# EAGLE board CT_schematic (EAGLE 7.6.0)

Size 100 x 80 mm. Coordinates in mm from the lower left corner, seen from the top.
Outline: 0,0 100,0 100,80 0,80 0,0
Copper layers (1*16): Top 0.035mm / dielectric 1.5mm / Bottom 0.035mm
Design rules "default": minimum track width 10mil, minimum drill 24mil, track to track 8mil, track to pad 8mil, pad to pad 8mil, via to via 8mil, smd to smd 8mil, copper to edge 40mil, drill to drill 8mil, minimum pad ring 10mil, minimum via ring 8mil, stop-mask expansion 4mil, vias tented up to drill 0mil, thermal gap 10mil

## Footprints (pad centres in the part's own frame; a part is rotated, then mirrored left to right if it is on the bottom)
C0603 = smd 0.8 x 0.8: 1 -0.762,0; 2 0.762,0
C0402 = smd 0.5 x 0.5: 1 -0.508,0; 2 0.508,0
C0805 = smd 1.2 x 1.3: 1 -1.016,0; 2 1.016,0
R0603 = smd 0.8 x 0.8: 1 -0.762,0; 2 0.762,0
C1206 = smd 1.3 x 1.6: 1 -1.524,0; 2 1.524,0
C1210 = smd 1.2 x 2.5: 1 -1.524,0; 2 1.524,0
2220 = smd 1.85 x 5.5: 1 -2.55,0; 2 2.55,0
EXV-9H = smd 3.505 x 1.676: 1 -2.857,0; 2 2.857,0
L0603 = smd 0.8 x 0.8: 1 -0.762,0; 2 0.762,0
DR1040 = smd 1.6 x 3.2: 1 -4.458,0; 2 4.458,0
PJ-037B_PACKAGE = drill 3.7 square: 1 12,0 | drill 3.2 square: 2 6,0
WLCSP66 = smd 0.229 x 0.229: A1 -1.6,1.6; A2 -1.2,1.6; A3 -0.8,1.6; A4 -0.4,1.6; A5 0,1.6; A6 0.4,1.6; A7 0.8,1.6; A8 1.2,1.6; A9 1.6,1.6; B1 -1.6,1.2; B2 -1.2,1.2; B3 -0.8,1.2; B4 -0.4,1.2; B5 0,1.2; B6 0.4,1.2; B7 0.8,1.2; B8 1.2,1.2; B9 1.6,1.2; C1 -1.6,0.8; C2 -1.2,0.8; C3 -0.8,0.8; C7 0.8,0.8; C8 1.2,0.8; C9 1.6,0.8; D1 -1.6,0.4; D2 -1.2,0.4; D3 -0.8,0.4; D7 0.8,0.4; D8 1.2,0.4; D9 1.6,0.4; E1 -1.6,0; E2 -1.2,0; E3 -0.8,0; E7 0.8,0; E8 1.2,0; E9 1.6,0; F1 -1.6,-0.4; F2 -1.2,-0.4; F3 -0.8,-0.4; F7 0.8,-0.4; F8 1.2,-0.4; F9 1.6,-0.4; G1 -1.6,-0.8; G2 -1.2,-0.8; G3 -0.8,-0.8; G7 0.8,-0.8; G8 1.2,-0.8; G9 1.6,-0.8; H1 -1.6,-1.2; H2 -1.2,-1.2; H3 -0.8,-1.2; H4 -0.4,-1.2; H5 0,-1.2; H6 0.4,-1.2; H7 0.8,-1.2; H8 1.2,-1.2; H9 1.6,-1.2; J1 -1.6,-1.6; J2 -1.2,-1.6; J3 -0.8,-1.6; J4 -0.4,-1.6; J5 0,-1.6; J6 0.4,-1.6; J7 0.8,-1.6; J8 1.2,-1.6; J9 1.6,-1.6
SOIC-8 = smd 1.6 x 0.6: 1 -2.7,1.905 | smd 1.55 x 0.6: 2 -2.7,0.635; 3 -2.7,-0.635; 4 -2.7,-1.905; 5 2.7,-1.905; 6 2.7,-0.635; 7 2.7,0.635; 8 2.7,1.905
M41T65_QFN-16 = smd 0.775 x 0.305: 1 -1.387,0.75; 2 -1.387,0.25; 3 -1.387,-0.25; 4 -1.387,-0.75; 9 1.387,-0.75; 10 1.387,-0.25; 11 1.387,0.25; 12 1.387,0.75 | smd 0.305 x 0.775: 5 -0.75,-1.387; 6 -0.25,-1.387; 7 0.25,-1.387; 8 0.75,-1.387; 13 0.75,1.387; 14 0.25,1.387; 15 -0.25,1.387; 16 -0.75,1.387 | smd 1.6 x 1.6: 17 0,0
SON-8 = smd 0.35 x 0.85: 1 -0.975,-1.475; 2 -0.325,-1.475; 3 0.325,-1.475; 4 0.975,-1.475; 5 0.975,1.475; 6 0.325,1.475; 7 -0.325,1.475; 8 -0.975,1.475 | smd 2.4 x 1.65: PAD 0,0
QFN-24 = smd 0.7 x 0.305: 1 -1.815,1.25; 2 -1.815,0.75; 3 -1.815,0.25; 4 -1.815,-0.25; 5 -1.815,-0.73; 6 -1.815,-1.25; 13 1.815,-1.25; 14 1.815,-0.75; 15 1.815,-0.25; 16 1.815,0.25; 17 1.815,0.75; 18 1.815,1.25 | smd 0.305 x 0.7: 7 -1.25,-1.815; 8 -0.75,-1.815; 9 -0.25,-1.815; 10 0.25,-1.815; 11 0.75,-1.815; 12 1.25,-1.815; 19 1.25,1.815; 20 0.75,1.815; 21 0.25,1.815; 22 -0.25,1.815; 23 -0.75,1.815; 24 -1.25,1.815 | smd 2.591 x 2.591: 25 0,0
USB-A-H = drill 0.914: 1 2.718,3.493; 2 2.718,1.003; 3 2.718,-1.003; 4 2.718,-3.493 | drill 2.311: 5 0,-6.566; 6 0,6.566
SOT143B = smd 1 x 0.7: 1 -0.75,-1 | smd 0.6 x 0.7: 2 0.95,-1; 3 0.95,1; 4 -0.95,1
SOT-23-6 = smd 1.1 x 0.6: 1 -1.4,0.95; 2 -1.4,0; 3 -1.4,-0.95; 4 1.4,-0.95; 5 1.4,0; 6 1.4,0.95
ABS07-32.768KHZ-7-T = smd 1.1 x 2.4: 1 -2.5,0; 2 0,0
ASEK = smd 1.4 x 1: 1 -1.1,-0.8; 2 1.1,-0.8; 3 1.1,0.8; 4 -1.1,0.8
ASFL1 = smd 1.7 x 1.5: 1 -1.27,-1.1; 2 1.27,-1.1; 3 1.27,1.1; 4 -1.27,1.1
WSON-8 = smd 0.3 x 0.6: 1 -0.75,0; 2 0.05,0; 3 0.85,0; 4 1.65,0; 5 1.65,3.8; 6 0.85,3.8; 7 0.05,3.8; 8 -0.75,3.8 | smd 3 x 2.6: PAD 0.45,1.9
QFN-16_EP = smd 0.805 x 0.3: 1 -1.452,0.75; 2 -1.452,0.25; 3 -1.452,-0.25; 4 -1.452,-0.75; 9 1.452,-0.75; 10 1.452,-0.25; 11 1.452,0.25; 12 1.452,0.75 | smd 0.3 x 0.805: 5 -0.75,-1.452; 6 -0.25,-1.452; 7 0.25,-1.452; 8 0.75,-1.452; 13 0.75,1.452; 14 0.25,1.452; 15 -0.25,1.452; 16 -0.75,1.452 | smd 1.55 x 1.55: 17 0,0
SON-6 = smd 0.55 x 0.3: 1 -0.355,0.5 | smd 0.52 x 0.3: 2 -0.37,0; 3 -0.37,-0.5; 4 0.37,-0.5; 5 0.37,0; 6 0.37,0.5
SW_4-1437565-2 = smd 1.4 x 2.1: 1 -2.23,4.55; 2 -2.23,-4.55; 3 2.23,4.55; 4 2.23,-4.55
LGM67K-G1J2-24-Z = smd 0.8 x 1.4: A -2,0; C 0,0
NC7SZ125M5X = smd 1.3 x 0.7: 1 -1.3,0.95; 2 -1.3,0; 3 -1.3,-0.95; 4 1.3,-0.95; 5 1.3,0.95

## Placement (x,y rotation side)
C1  1e-06  [C0603]  -34.29,64.77 0 top  (outside the outline)
C2  1e-07  [C0603]  -38.1,64.77 0 top  (outside the outline)
C3  1e-07  [C0603]  -41.91,64.77 0 top  (outside the outline)
C4  1e-07  [C0603]  -45.72,64.77 0 top  (outside the outline)
C5  1e-07  [C0603]  -49.53,64.77 0 top  (outside the outline)
C6  1e-07  [C0603]  -53.34,64.77 0 top  (outside the outline)
C7  4.7e-06  [C0603]  -19.05,64.77 0 top  (outside the outline)
C8  1e-08  [C0603]  -57.15,64.77 0 top  (outside the outline)
C9  1e-06  [C0603]  -60.96,64.77 0 top  (outside the outline)
C10  2.2e-06  [C0603]  -22.86,64.77 0 top  (outside the outline)
C11  2.2e-06  [C0603]  -26.67,64.77 0 top  (outside the outline)
C12  1e-08  [C0402]  -64.77,69.85 0 top  (outside the outline)
C13  4.7e-06  [C0805]  -15.24,54.61 0 top  (outside the outline)
C14  1e-07  [C0402]  -68.58,69.85 0 top  (outside the outline)
C15  1e-08  [C0402]  -72.39,69.85 0 top  (outside the outline)
C16  2.2e-06  [C0603]  -30.48,64.77 0 top  (outside the outline)
C17  1e-08  [C0402]  -15.24,74.93 0 top  (outside the outline)
C18  1e-08  [C0402]  -19.05,74.93 0 top  (outside the outline)
C19  0.0001  [R0603]  -64.77,64.77 0 top  (outside the outline)
C20  1e-08  [C0402]  -22.86,74.93 0 top  (outside the outline)
C21  1e-08  [C0402]  -26.67,74.93 0 top  (outside the outline)
C22  1e-08  [C0402]  -30.48,74.93 0 top  (outside the outline)
C23  1e-08  [C0402]  -34.29,74.93 0 top  (outside the outline)
C24  1e-05  [C1206]  -54.61,46.99 0 top  (outside the outline)
C25  1e-05  [C0805]  -20.32,54.61 0 top  (outside the outline)
C26  1e-06  [C0603]  -68.58,64.77 0 top  (outside the outline)
C27  1e-05  [C1210]  -48.26,48.26 0 top  (outside the outline)
C28  1e-05  [C0805]  -25.4,54.61 0 top  (outside the outline)
C29  1e-06  [C0603]  -72.39,64.77 0 top  (outside the outline)
C30  1e-07  [C0402]  -38.1,74.93 0 top  (outside the outline)
C31  6.8e-05  [2220]  -33.02,22.86 0 top  (outside the outline)
C32  1e-07  [C0402]  -41.91,74.93 0 top  (outside the outline)
C33  0.0001  [EXV-9H]  -17.78,40.64 0 top  (outside the outline)
C34  0.0001  [EXV-9H]  -29.21,40.64 0 top  (outside the outline)
C35  1e-08  [C0402]  -45.72,74.93 0 top  (outside the outline)
C36  1e-08  [C0402]  -49.53,74.93 0 top  (outside the outline)
F1  240.0  [L0603]  -15.24,69.85 0 top  (outside the outline)
I1  5.2e-06  [DR1040]  -71.12,6.35 0 top  (outside the outline)
J1  PJ-037B  [PJ-037B_PACKAGE]  -44.45,7.62 0 top  (outside the outline)
R2  1000.0  [R0603]  -19.05,69.85 0 top  (outside the outline)
R4  4700.0  [R0603]  -22.86,69.85 0 top  (outside the outline)
R5  4700.0  [R0603]  -26.67,69.85 0 top  (outside the outline)
R6  2200.0  [R0603]  -30.48,69.85 0 top  (outside the outline)
R7  2200.0  [R0603]  -34.29,69.85 0 top  (outside the outline)
R8  2200.0  [R0603]  -38.1,69.85 0 top  (outside the outline)
R9  2200.0  [R0603]  -41.91,69.85 0 top  (outside the outline)
R10  10000.0  [R0603]  -71.12,54.61 0 top  (outside the outline)
R11  10000.0  [R0603]  -15.24,59.69 0 top  (outside the outline)
R12  10000.0  [R0603]  -20.32,59.69 0 top  (outside the outline)
R13  10000.0  [R0603]  -25.4,59.69 0 top  (outside the outline)
R14  10000.0  [R0603]  -30.48,59.69 0 top  (outside the outline)
R15  10000.0  [R0603]  -35.56,59.69 0 top  (outside the outline)
R16  10000.0  [R0603]  -40.64,59.69 0 top  (outside the outline)
R17  10000.0  [R0603]  -45.72,59.69 0 top  (outside the outline)
R18  10000.0  [R0603]  -50.8,59.69 0 top  (outside the outline)
R19  47000.0  [R0603]  -55.88,59.69 0 top  (outside the outline)
R20  8060.0  [R0603]  -45.72,69.85 0 top  (outside the outline)
R21  100000.0  [R0603]  -35.56,54.61 0 top  (outside the outline)
R22  806.0  [R0603]  -49.53,69.85 0 top  (outside the outline)
R23  1000.0  [R0603]  -53.34,69.85 0 top  (outside the outline)
R24  100000.0  [R0603]  -40.64,54.61 0 top  (outside the outline)
R25  153694.38  [R0603]  -30.48,54.61 0 top  (outside the outline)
R26  100000.0  [R0603]  -45.72,54.61 0 top  (outside the outline)
R27  20000.0  [R0603]  -60.96,59.69 0 top  (outside the outline)
R28  150000.0  [R0603]  -50.8,54.61 0 top  (outside the outline)
R29  300000.0  [R0603]  -55.88,54.61 0 top  (outside the outline)
R30  10000.0  [R0603]  -66.04,59.69 0 top  (outside the outline)
R31  10000.0  [R0603]  -71.12,59.69 0 top  (outside the outline)
R32  82000.0  [R0603]  -15.24,64.77 0 top  (outside the outline)
R33  300000.0  [R0603]  -60.96,54.61 0 top  (outside the outline)
R34  120000.0  [R0603]  -66.04,54.61 0 top  (outside the outline)
U1  STM32F205REY6  [WLCSP66]  -16.51,46.99 0 top  (outside the outline)
U2  AT25320B-SSHL-T  [SOIC-8]  -24.13,22.86 0 top  (outside the outline)
U3  M41T65Q6F  [M41T65_QFN-16]  -54.61,74.93 0 top  (outside the outline)
U4  PCF85063TP/1Z  [SON-8]  -35.56,46.99 0 top  (outside the outline)
U5  USB3317C-CP-TR  [QFN-24]  -40.64,48.26 0 top  (outside the outline)
U6  61400416021  [USB-A-H]  -19.05,8.89 0 top  (outside the outline)
U7  prtr5v0u2ax  [SOT143B]  -69.85,74.93 0 top  (outside the outline)
U8  MAX4995AAUT+T  [SOT-23-6]  -59.69,46.99 0 top  (outside the outline)
U9  ABS07-32.768KHZ-7-T  [ABS07-32.768KHZ-7-T]  -50.8,40.64 0 top  (outside the outline)
U10  ABS07-32.768KHZ-7-T  [ABS07-32.768KHZ-7-T]  -69.85,40.64 0 top  (outside the outline)
U11  ASEK-32.768KHz-ECST  [ASEK]  -63.5,31.75 0 top  (outside the outline)
U12  ASFL1-25MHZ-NCS  [ASFL1]  -26.67,31.75 0 top  (outside the outline)
U13  ASFL1-26MHZ-NCS  [ASFL1]  -43.18,31.75 0 top  (outside the outline)
U14  LP3878SDX-ADJ/NOPB  [WSON-8]  -54.61,20.32 0 top  (outside the outline)
U15  LP2951ACSDX/NOPB  [WSON-8]  -72.39,20.32 0 top  (outside the outline)
U16  LTC3601EUD#PBF  [QFN-16_EP]  -58.42,69.85 0 top  (outside the outline)
U17  TPS3895ADRYR  [SON-6]  -73.66,73.66 0 top  (outside the outline)
U18  4-1437565-2  [SW_4-1437565-2]  -60.96,6.35 0 top  (outside the outline)
U19  Q65110A2395  [LGM67K-G1J2-24-Z]  -25.4,48.26 0 top  (outside the outline)
U20  nc7sz125m5x  [NC7SZ125M5X]  -64.77,46.99 0 top  (outside the outline)
U21  nc7sz125m5x  [NC7SZ125M5X]  -71.12,46.99 0 top  (outside the outline)

## Library data of the parts
C1-C36 F1 I1 J1 R2 R4-R34 U1-U21 = circuit_tree

## Nets
CLK_CRYSTAL_U3_1: U3.1 U9.1
CLK_CRYSTAL_U3_2: U3.2 U9.2
CLK_CRYSTAL_U4_1: U4.1 U10.1
CLK_CRYSTAL_U4_2: U4.2 U10.2
CLK_U1_B9: U1.B9 U11.3
CLK_U1_E9: U1.E9 U12.3
CLK_U5_23: U5.23 U13.3
GND: C1.2 C2.2 C3.2 C4.2 C5.2 C6.2 C7.2 C8.2 C9.2 C10.2 C11.2 C12.2 C13.2 C14.2 C15.2 C16.2 C17.2 C18.2 C19.2 C20.2 C21.2 C22.2 C23.2 C24.2 C25.2 C26.2 C27.2 C28.2 C29.2 C31.1 C31.2 C32.2 C33.2 C34.2 C35.2 C36.2 J1.2 R2.2 R10.2 R11.2 R12.2 R19.2 R20.2 R23.2 R26.2 R27.2 R29.2 R32.2 R34.2 U1.B1 U1.D8 U1.F1 U1.H9 U2.4 U3.3 U3.5 U3.17 U4.4 U4.PAD U5.1 U5.25 U6.4 U6.5 U6.6 U7.1 U8.2 U11.2 U12.2 U13.2 U14.3 U14.PAD U15.3 U15.4 U15.PAD U16.1 U16.9 U16.17 U17.2 U19.C U20.1 U20.3 U21.1 U21.3
NET_U1_A6: R7.1 U1.A6 U4.5
NET_U1_B5: R6.1 U1.B5 U4.6
NET_U1_B6: R10.1 U1.B6
NET_U1_C2: C11.1 U1.C2
NET_U1_C8: R12.1 U1.C8
NET_U1_D1: R9.1 U1.D1 U3.9
NET_U1_E2: R8.1 U1.E2 U3.10
NET_U1_E8: R4.1 U1.E8 U20.4
NET_U1_F7: C8.1 C9.1 F1.1 U1.F7
NET_U1_H7: R11.1 U1.H7
NET_U1_J3: C10.1 U1.J3
NET_U1_J8: U19.A
NET_U1_J9: U18.3 U18.4
NET_U2_3: R13.1 U2.3
NET_U2_7: R15.1 U2.7
NET_U3_4: R16.1 U3.4
NET_U3_11: R17.1 U3.11
NET_U4_3: R18.1 U4.3
NET_U5_4: C16.1 U5.4
NET_U5_22: R5.1 U5.22 U21.4
NET_U5_24: R20.1 U5.24
NET_U6_1: C19.1 U5.2 U6.1 U7.4 U8.1
NET_U6_2: U5.5 U6.2 U7.3
NET_U6_3: U5.6 U6.3 U7.2
NET_U8_3: R19.1 U8.3
NET_U8_4: U5.7 U8.4
NET_U14_1: C23.1 U14.1
NET_U14_6: R22.2 R23.1 U14.6
NET_U14_8: R21.1 U14.8
NET_U15_5: R24.1 U15.5
NET_U15_7: R25.2 R26.1 U15.7
NET_U16_3: C30.2 I1.1 U16.3 U16.4
NET_U16_6: C30.1 U16.6
NET_U16_7: C29.1 U16.7 U16.12
NET_U16_10: R29.1 U16.10
NET_U16_11: R27.1 R28.1 U16.11
NET_U16_14: U16.14
NET_U16_ATNET_3: I1.2 R28.2
NET_U17_1: R31.1 R32.1 U17.1
NET_U17_3: R33.2 R34.1 U17.3
NET_U17_4: R30.1 U17.4 U20.2 U21.2
NET_U18_1: R2.1 U18.1 U18.2
PROC_SPI1_MISO: U1.B4 U2.2
PROC_SPI1_MOSI: U1.J7 U2.5
PROC_SPI1_NSS: R14.1 U1.A2 U2.1
PROC_SPI1_SCK: U1.A4 U2.6
PROC_USB_OTG_HS_ULPI_CK: U1.H6 U5.12
PROC_USB_OTG_HS_ULPI_D0: U1.G7 U5.16
PROC_USB_OTG_HS_ULPI_D1: U1.J6 U5.15
PROC_USB_OTG_HS_ULPI_D2: U1.J5 U5.14
PROC_USB_OTG_HS_ULPI_D3: U1.H3 U5.13
PROC_USB_OTG_HS_ULPI_D4: U1.J2 U5.11
PROC_USB_OTG_HS_ULPI_D5: U1.J1 U5.10
PROC_USB_OTG_HS_ULPI_D6: U1.H2 U5.9
PROC_USB_OTG_HS_ULPI_D7: U1.A5 U5.8
PROC_USB_OTG_HS_ULPI_DIR: U1.D7 U5.19
PROC_USB_OTG_HS_ULPI_NXT: U1.G8 U5.18
PROC_USB_OTG_HS_ULPI_STP: U1.G9 U5.20
VCC_S1_6V8: C24.1 C26.1 C28.1 C33.1 C34.1 J1.1 R21.2 U14.4 U15.8 U16.15 U16.16
VCC_TIER1_1V8: C1.1 C2.1 C3.1 C4.1 C5.1 C6.1 C7.1 C12.1 C13.1 C14.1 C17.1 C18.1 C25.1 C32.1 C35.1 C36.1 F1.2 R4.2 R5.2 R6.2 R7.2 R8.2 R9.2 R13.2 R14.2 R15.2 R16.2 R17.2 R18.2 R22.1 R30.2 R31.2 R33.1 U1.A8 U1.A9 U1.D9 U1.E1 U2.8 U3.14 U4.8 U5.17 U5.21 U14.5 U17.6 U20.5 U21.5
VCC_TIER1_3V3: C15.1 C20.1 C21.1 C22.1 C27.1 R24.2 R25.1 U5.3 U11.4 U12.4 U13.4 U15.1
VCC_TIER1_5V0: C31.2 I1.2 R28.2 U8.5 U16.8

## Tracks (layer width: path | path; a pad name or v marks a point on that pad's centre or on a via)
CLK_CRYSTAL_U3_1  (1 unrouted)
CLK_CRYSTAL_U3_2  (1 unrouted)
CLK_CRYSTAL_U4_1  (1 unrouted)
CLK_CRYSTAL_U4_2  (1 unrouted)
CLK_U1_B9  (1 unrouted)
CLK_U1_E9  (1 unrouted)
CLK_U5_23  (1 unrouted)
GND  (82 unrouted)
NET_U1_A6  (2 unrouted)
NET_U1_B5  (2 unrouted)
NET_U1_B6  (1 unrouted)
NET_U1_C2  (1 unrouted)
NET_U1_C8  (1 unrouted)
NET_U1_D1  (2 unrouted)
NET_U1_E2  (2 unrouted)
NET_U1_E8  (2 unrouted)
NET_U1_F7  (3 unrouted)
NET_U1_H7  (1 unrouted)
NET_U1_J3  (1 unrouted)
NET_U1_J9  (1 unrouted)
NET_U2_3  (1 unrouted)
NET_U2_7  (1 unrouted)
NET_U3_4  (1 unrouted)
NET_U3_11  (1 unrouted)
NET_U4_3  (1 unrouted)
NET_U5_4  (1 unrouted)
NET_U5_22  (2 unrouted)
NET_U5_24  (1 unrouted)
NET_U6_1  (4 unrouted)
NET_U6_2  (2 unrouted)
NET_U6_3  (2 unrouted)
NET_U8_3  (1 unrouted)
NET_U8_4  (1 unrouted)
NET_U14_1  (1 unrouted)
NET_U14_6  (2 unrouted)
NET_U14_8  (1 unrouted)
NET_U15_5  (1 unrouted)
NET_U15_7  (2 unrouted)
NET_U16_3  (3 unrouted)
NET_U16_6  (1 unrouted)
NET_U16_7  (2 unrouted)
NET_U16_10  (1 unrouted)
NET_U16_11  (2 unrouted)
NET_U16_ATNET_3  (1 unrouted)
NET_U17_1  (2 unrouted)
NET_U17_3  (2 unrouted)
NET_U17_4  (3 unrouted)
NET_U18_1  (2 unrouted)
PROC_SPI1_MISO  (1 unrouted)
PROC_SPI1_MOSI  (1 unrouted)
PROC_SPI1_NSS  (2 unrouted)
PROC_SPI1_SCK  (1 unrouted)
PROC_USB_OTG_HS_ULPI_CK  (1 unrouted)
PROC_USB_OTG_HS_ULPI_D0  (1 unrouted)
PROC_USB_OTG_HS_ULPI_D1  (1 unrouted)
PROC_USB_OTG_HS_ULPI_D2  (1 unrouted)
PROC_USB_OTG_HS_ULPI_D3  (1 unrouted)
PROC_USB_OTG_HS_ULPI_D4  (1 unrouted)
PROC_USB_OTG_HS_ULPI_D5  (1 unrouted)
PROC_USB_OTG_HS_ULPI_D6  (1 unrouted)
PROC_USB_OTG_HS_ULPI_D7  (1 unrouted)
PROC_USB_OTG_HS_ULPI_DIR  (1 unrouted)
PROC_USB_OTG_HS_ULPI_NXT  (1 unrouted)
PROC_USB_OTG_HS_ULPI_STP  (1 unrouted)
VCC_S1_6V8  (10 unrouted)
VCC_TIER1_1V8  (45 unrouted)
VCC_TIER1_3V3  (11 unrouted)
VCC_TIER1_5V0  (4 unrouted)